# Altium PCB E20XXEDGEPCBA1.PcbDoc
Units mil, origin at the board's own origin, x right, y up, seen from the top; angles counter-clockwise.
Board outline 2300 x 1600 mil, 2 copper layers (Top Layer, Bottom Layer); 13 components, 46 nets, 73 pads, 3 vias.
Unrouted connection lines stored in the file: 1.
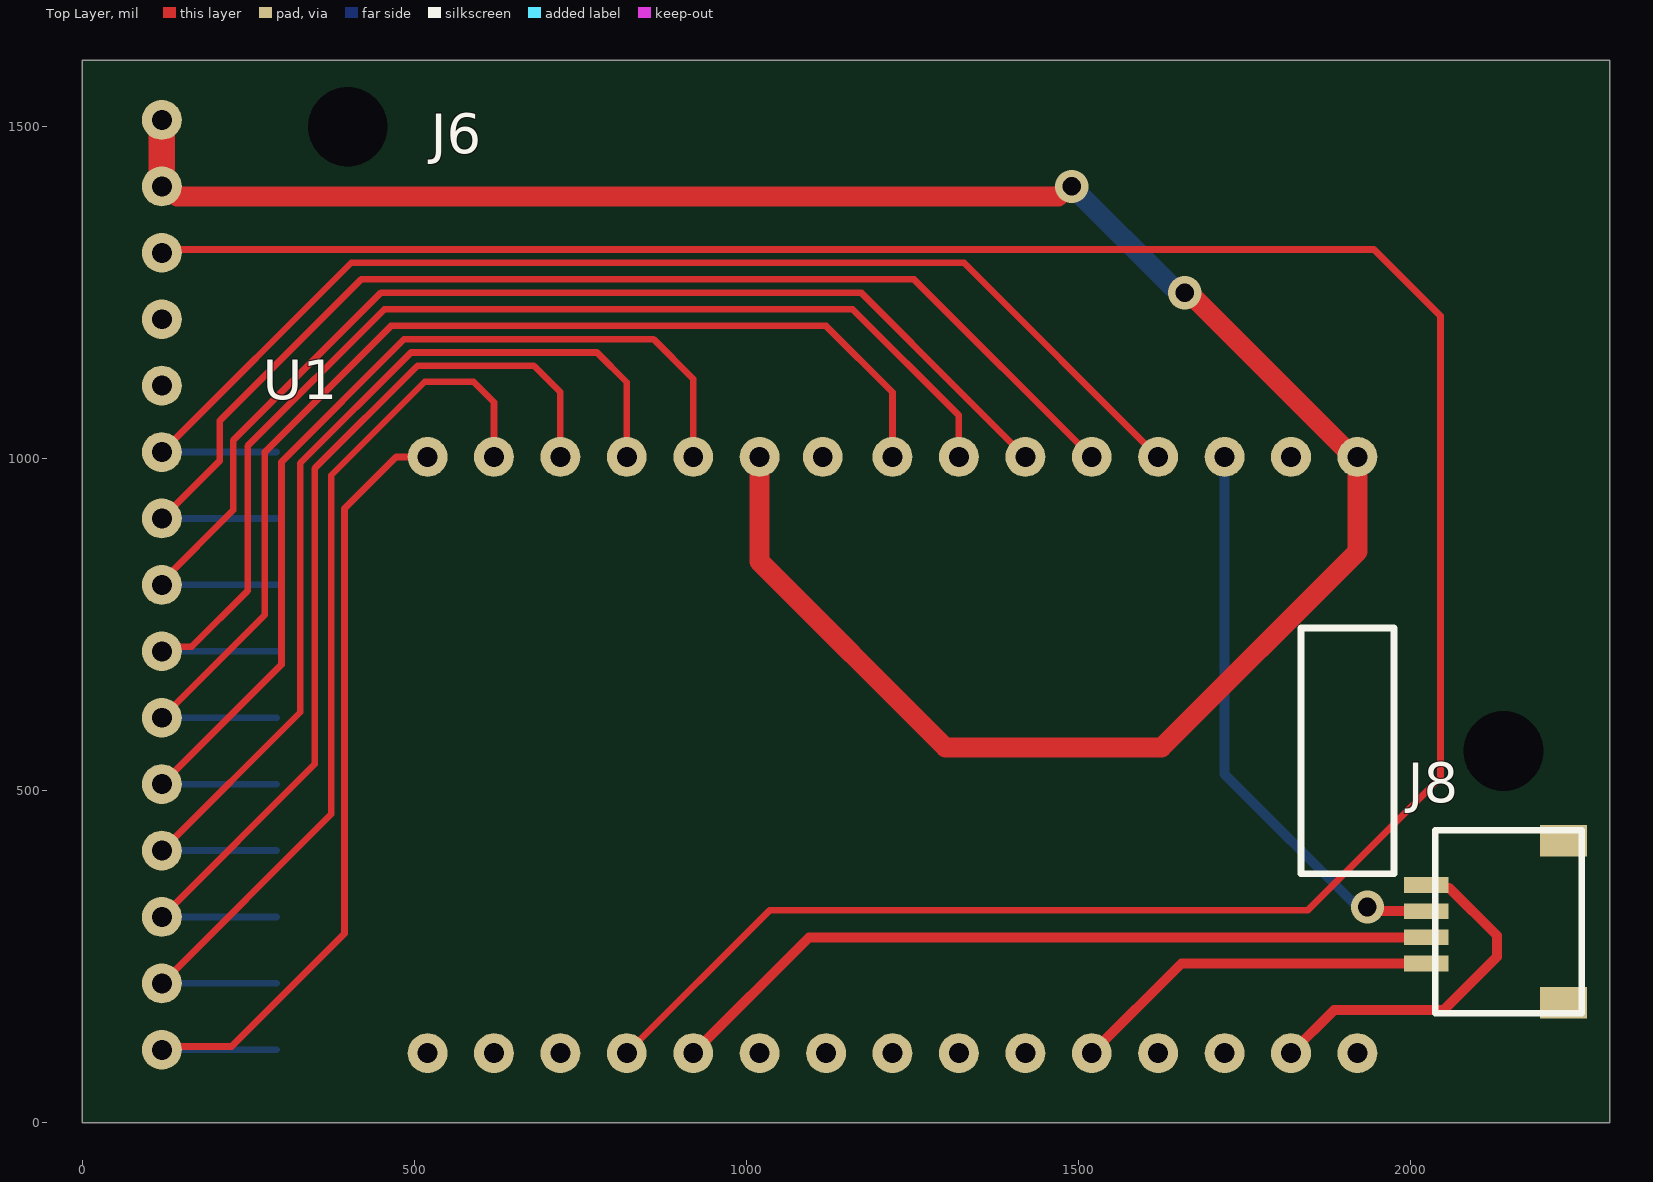
[diagram p0: Top Layer view]
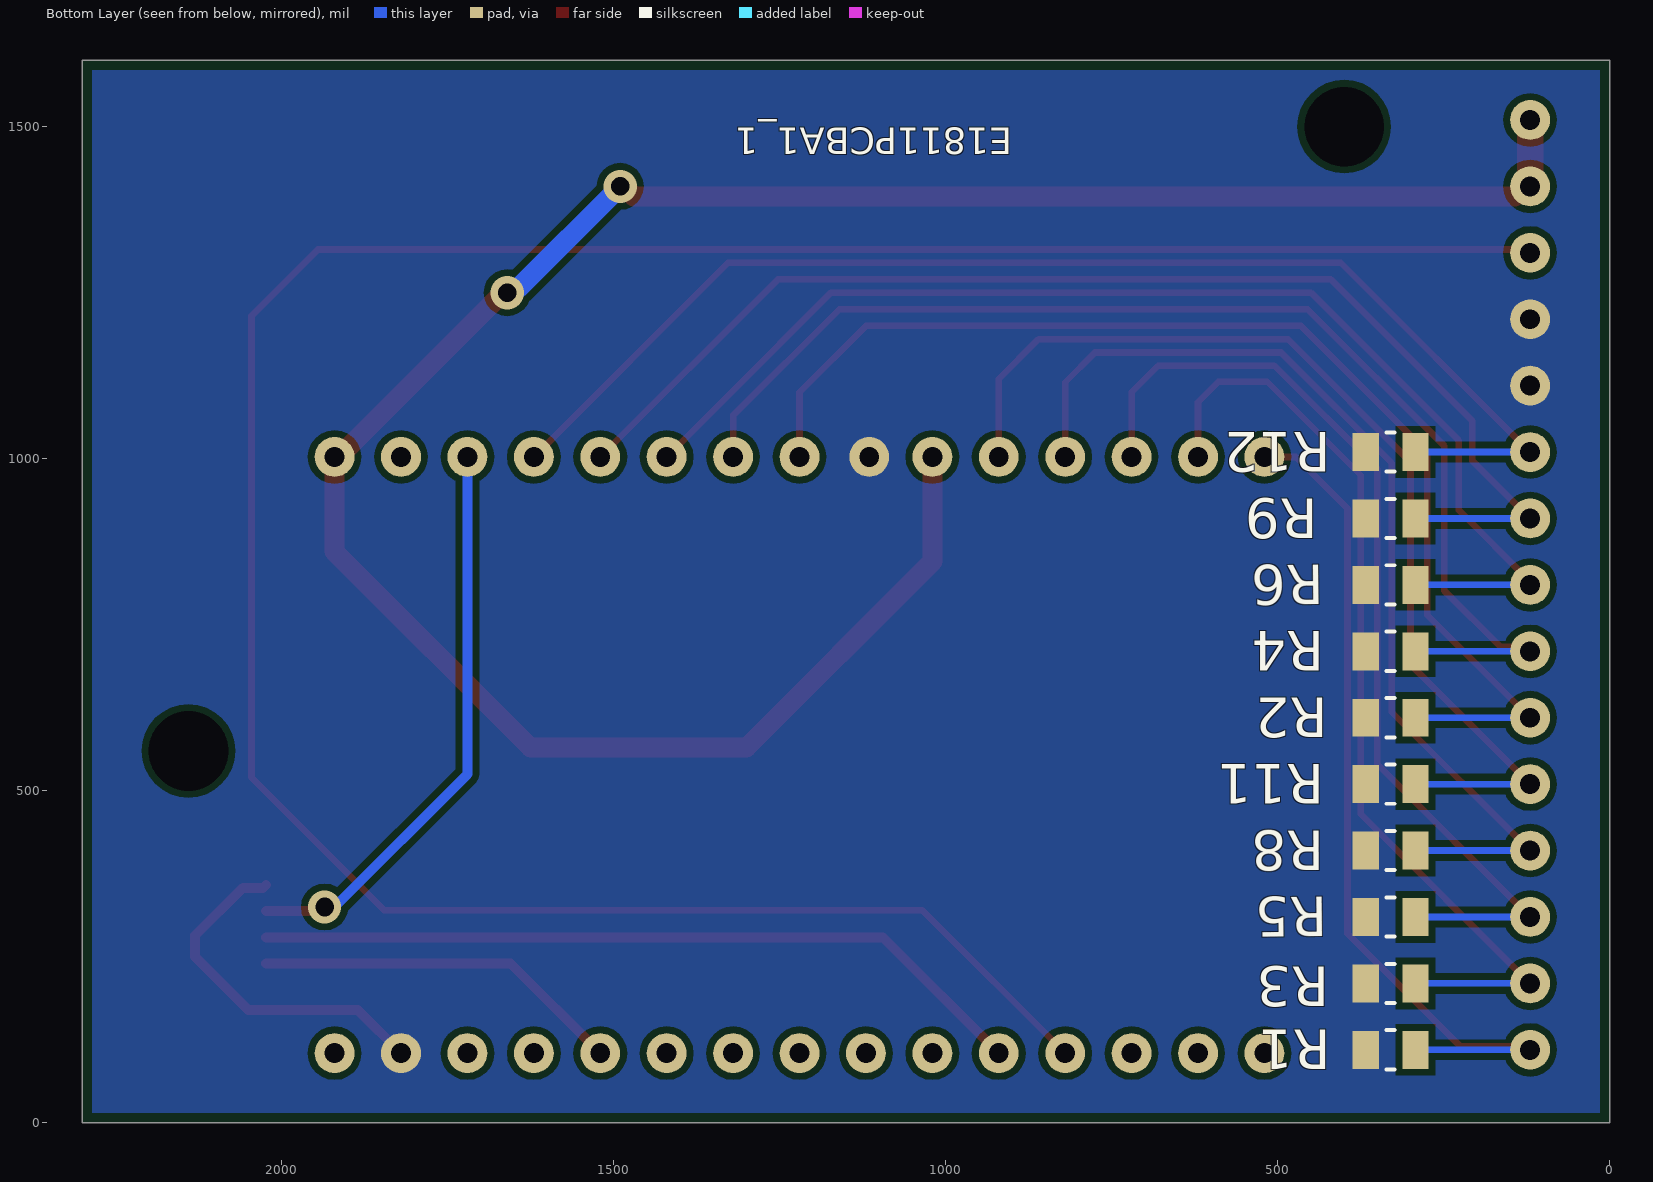
[diagram p1: Bottom Layer view, seen from below]
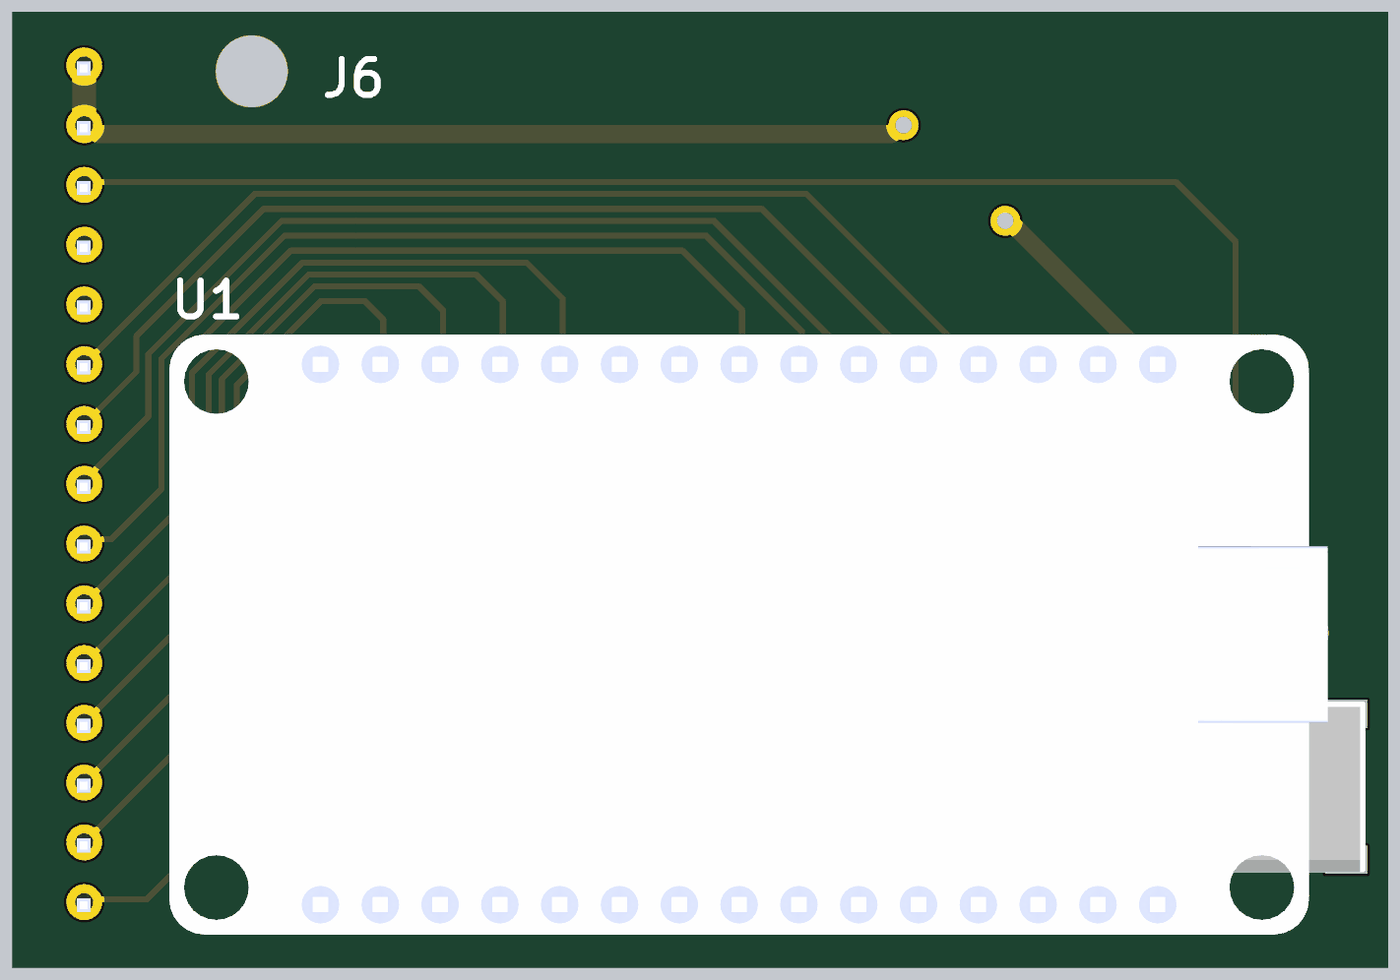
[diagram p2: 3D render of the assembled board from above, using the file's embedded part models]
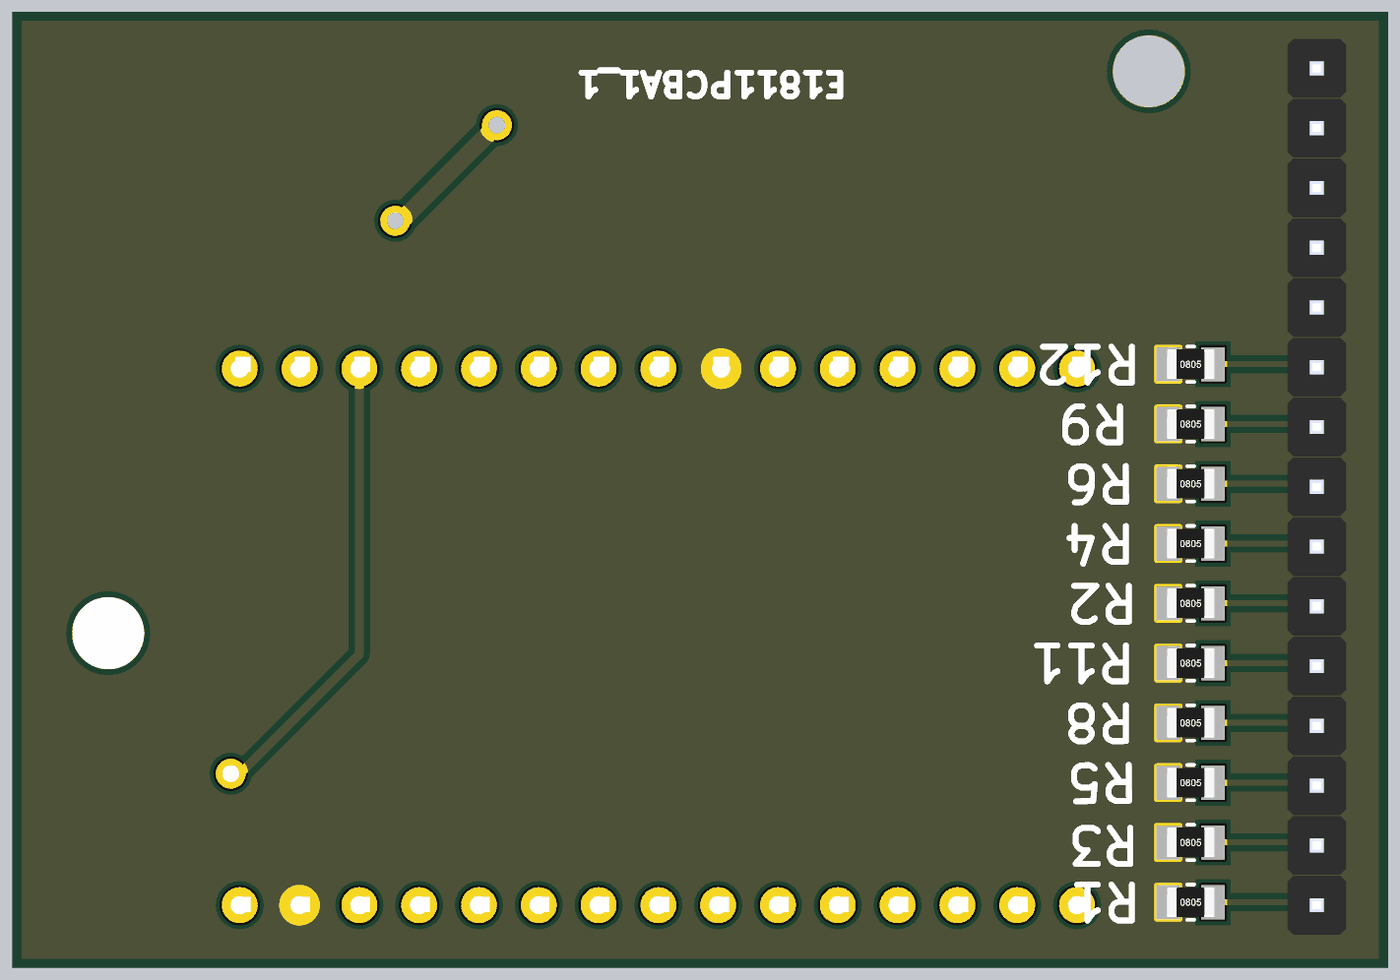
[diagram p3: 3D render of the assembled board from below, using the file's embedded part models]

## Layer stack, top to bottom
Top Solder: solder mask 0.4, Solder Resist, Dk 3.5
Top Layer: signal copper 1.4
Dielectric 1: dielectric 12.6, FR-4, Dk 4.8
Bottom Layer: signal copper 1.4
Bottom Solder: solder mask 0.4, Solder Resist, Dk 3.5

## Board outline
0,0 0,1600 2300,1600 2300,0

## Design rules (kind name [scope] priority, off if disabled: settings)
Clearance [All] p1: gap=10 ignorepadtopadclearanceinfootprint=FALSE except(0: Arc-Hole Track-Hole SMDPad-Hole THPad-Hole Via-Hole Fill-Hole Poly-Hole Region-Hole Text-Hole)
PlaneConnect [All] p1: planeconnectstyle=Direct reliefexpansion=20 reliefentries=4 reliefconductorwidth=10 reliefairgap=10
PolygonConnect [All] p1: connectstyle=Direct reliefconductorwidth=10 reliefentries=4 polygonreliefangle="90 Angle" airgapwidth=10
RoutingVias [All] p1: holewidth=28 width=50 viastyle="Through Hole" minholewidth=28 minwidth=50 maxholewidth=28 maxwidth=50
SolderMaskExpansion [All] p1: expansion=4 istentingtop=FALSE
Width [All] p1: maxlimit=50 minlimit=10 preferedwidth=10
29 further rules are at their usual default settings.

## Components (designator, comment, footprint, x,y, rotation, side; value= is the part's Value field where it differs from the comment)
J6 "61301511121" 61301511121 120,110 r90 top
J8 "84981-4" 84981-4 2257.56,165.16 r90 top
R1 "10K" RESC2012N 330,110 r180 bottom
R2 "10K" RESC2012N 330,610 r180 bottom
R3 "10K" RESC2012N 330,210 r180 bottom
R4 "10K" RESC2012N 330,710 r180 bottom
R5 "10K" RESC2012N 330,310 r180 bottom
R6 "10K" RESC2012N 330,810 r180 bottom
R8 "10K" RESC2012N 330,410 r180 bottom
R9 "10K" RESC2012N 330,910 r180 bottom
R11 "10K" RESC2012N 330,510 r180 bottom
R12 "10K" RESC2012N 330,1010 r180 bottom
U1 "ESP8266MOD" ESP8266NODEMCU 520,105 r90 top

## Footprints (in the part's own frame and the unit in brackets; to place one, negate y for a bottom-side part, rotate by r counter-clockwise, add the part's x,y. Pads: shape width x height; smd on the part's side, far side on the other; paste and mask are expansions set on the pad)
84981-4 [mm]
  rect 1.2x1.8 smd: 0(0.4,0.7) 0(6.6,0.7)
  rect 0.6x1.7 smd: 1(1.9,5.95) 2(2.9,5.95) 3(3.9,5.95) 4(4.9,5.95)
  silkscreen extent 0,0 7,5.6, body extent -0.1,0.1 6.9,6.4, height 3
61301511121 [mil]
  round 60 hole 30: 1(0,0) 2(100,0) 3(200,0) 4(300,0) 5(400,0) 6(500,0) 7(600,0) 8(700,0) 9(800,0) 10(900,0) 11(1000,0) 12(1100,0) 13(1200,0) 14(1300,0) 15(1400,0)
  body extent -54,-48 1444,50, height 85
ESP8266NODEMCU [mil] "NODEMCU ESP8266"
  round 60 hole 30: 1(0,0) 2(0,-100) 3(0,-200) 4(0,-300) 5(0,-400) 6(0,-500) 7(0,-600) 8(0,-700) 9(0,-800) 10(0,-900) 11(0,-1000) 12(0,-1100) 13(0,-1200) 14(0,-1300) 15(0,-1400) 16(897.64,-1400) 17(897.64,-1300) 18(897.64,-1200) 19(897.64,-1100) 20(897.64,-1000) 21(897.64,-900) 22(897.64,-800) 23(897.64,-700) 24(897.64,-595) 25(897.64,-500) 26(897.64,-400) 27(897.64,-300) 28(897.64,-200) 29(897.64,-100) 30(897.64,0)
  body extent -49,-1679 955,258, height 299
RESC2012N [mm] "Chip Resistor, Body 2.0x1.3mm, IPC Med Density"
  rect 1x1.45 smd: 1(-0.95,0) 2(0.95,0)
  silkscreen extent -0.15,-0.75 0.15,0.75, body extent -1,-0.62 1,0.63, height 0.59

## Part data
J6: "WURTH ELEKTRONIK         61301511121            Board-To-Board Connector, Vertical, WR-PHD Series, Through Hole, Header, 15 Contacts, 2.54 mm", Color=Black, Manufacturer="Wurth Electronics", Supplier Part Number 1=732-5326-ND, Category=Connectors, ComponentLink1Description=http://www.farnell.com/cad/1737268.pdf?src-supplier=Element14, ComponentLink1URL=http://www.farnell.com/cad/1737268.pdf?src-supplier=Element14, ComponentLink2Description=https://katalog.we-online.de/em/datasheet/6130xx11121.pdf?src-supplier=Digi-Key, ComponentLink2URL=https://katalog.we-online.de/em/datasheet/6130xx11121.pdf?src-supplier=Digi-Key, Connector Type="Male Pin", Contact Material=Copper, Contact Mating Length=0.236inch, Contact Plating=Gold, Gender=Male, Manufacturer Part Number=61301511121, Mount="Through Hole", Number of Contacts=15, Number of Positions=15, Number of Rows=1, Packaging=Bulk, Pitch=0.1inch, Pricing 1="1=0.82000, 10=0.69700, 25=0.58120, 50=0.48400, 100=0.44000, 500=0.40000 (USD)", REACH SVHC=Unknown, RoHS=Yes, RoHS Compliant=Yes, Stock 1=961, Supplier 1=Digi-Key, Termination=Solder
R1 R2 R3 R4 R5 R6 R8 R9 R11 R12: library part Res_10K_0805, "RES 10K OHM 1/8W 1% 0805", Case Code (Imperial)=0805, Case Code (Metric)=2012, Manufacturer=Vishay, Manufacturer P/N=CRCW080510K0FKEA, Max Operating Temperature=155°C, Min Operating Temperature=-55°C, Package Quantity=5000, Power Rating=125mW, Resistance=10kR, Supplier Part Number 1=541-10.0KCCT-ND, Temperature Coefficient=100ppm/°C, Tolerance=1%, Voltage Rating=150V, Case/Package=0805, ComponentLink4Description=http://www.vishay.com/docs/20035/dcrcwe3.pdf, ComponentLink4URL=http://www.vishay.com/docs/20035/dcrcwe3.pdf, Composition="Thick Film", Contact Plating=Tin, Depth=1.25mm, Height=0.45mm, Lead Free="Lead Free", Length=2mm, Military Standard=Not, Radiation Hardening=No, REACH SVHC=Unknown, Supplier 1=Digi-Key, Termination=SMD/SMT, Voltage Rating (DC)=150V, Weight=0.000194oz, Width=1.25mm

## Free pads (board coordinates)
  round 60 hole 120: 0(400,1500) 0(2140,560)

## Via types
v1: diameter 50, hole 28, Top Layer to Bottom Layer, 3 vias

## Nets (pads, with @x,y where several pads share a name; then routed paths per layer and width w, separated by ;. In a path a pad name is that pad's centre, name@x,y a point inside that pad or via, vN(x,y) a via of type N, cw(c..) or ccw(c..) an arc to the next point about the centre after c; other vN are vias at no path point)
GND: J6.11 J6.12 J8.4 R1.1 R2.1 R3.1 R4.1 R5.1 R6.1 R8.1 R9.1 R11.1 R12.1 U1.14 U1.24 | length 540.3
  Top Layer w15: U1.14 1885,170 2050,170 2130,250 2130,282.03 2058.27,353.76 2027.62,353.76 J8.4
GND_HOUS: 
NetC3_2: 
NetC4_2: 
NetC5_2: 
NetC6_2: 
NetC7_2: 
NetC8_2: 
NetJ1_1: 
NetJ1_3: 
NetJ3_1: 
NetJ3_2: 
NetJ3_3: 
NetJ4_1: 
NetJ4_2: 
NetJ4_3: 
NetJ4_4: 
NetJ4_5: 
NetJ4_6: 
NetJ4_7: 
NetJ4_8: 
NetJ4_9: 
NetJ4_10: 
NetJ4_11: 
NetJ6_1: J6.1 R1.2 U1.30 | length 1317.2
  Top Layer w10: J6.1 125,115 225,115 395,285 395,925 472.64,1002.64 U1.30
  Bottom Layer w10: J6.1 R1.2
NetJ6_2: J6.2 R3.2 U1.29 | length 1441.7
  Top Layer w10: J6.2 375,465 375,975 515.86,1115.86 589.14,1115.86 620,1085 U1.29
  Bottom Layer w10: J6.2 R3.2
NetJ6_3: J6.3 R5.2 U1.28 | length 1491
  Top Layer w10: J6.3 350,540 350,985 505,1140 680,1140 720,1100 U1.28
  Bottom Layer w10: J6.3 R5.2
NetJ6_4: J6.4 R8.2 U1.27 | length 1533.9
  Top Layer w10: J6.4 328.36,618.36 328.36,993.36 495,1160 775,1160 820,1115 U1.27
  Bottom Layer w10: J6.4 R8.2
NetJ6_5: J6.5 R11.2 U1.26 | length 1571
  Top Layer w10: J6.5 300,690 300,995 485,1180 860,1180 920,1120 U1.26
  Bottom Layer w10: J6.5 R11.2
NetJ6_6: J6.6 R2.2 U1.23 | length 1799.3
  Top Layer w10: J6.6 275,765 275,1010 465,1200 1120,1200 1220,1100 U1.23
  Bottom Layer w10: J6.6 R2.2
NetJ6_7: J6.7 R4.2 U1.22 | length 1842.3
  Top Layer w10: J6.7 127,717 165,717 249,801 249,1019 455,1225 1160,1225 1320,1065 U1.22
  Bottom Layer w10: J6.7 R4.2
NetJ6_8: J6.8 R6.2 U1.21 | length 1821.7
  Top Layer w10: J6.8 120,815 227.28,922.28 227.28,1027.28 450,1250 1172.64,1250 1326.64,1095.99 U1.21
  Bottom Layer w10: J6.8 R6.2
NetJ6_9: J6.9 R9.2 U1.20 | length 1867.6
  Top Layer w10: J6.9 207.28,997.28 207.28,1057.28 420,1270 1252.64,1270 U1.20
  Bottom Layer w10: J6.9 R9.2
NetJ6_10: J6.10 R12.2 U1.19 | length 1911.7
  Top Layer w10: J6.10 405,1295 1327.64,1295 U1.19
  Bottom Layer w10: J6.10 R12.2
NetJ6_13: J6.13 U1.4 | length 4060.4
  Top Layer w10: J6.13 125,1315 1945,1315 2045,1215 2045,520 1845,320 1035,320 U1.4
NetJ7_13: 
NetJ8_2: J8.2 U1.5 | length 1175.5
  Top Layer w15: U1.5 1094.33,279.33 J8.2
NetJ8_3: J8.3 U1.18 | length 851.4
  Top Layer w15: v1(1935,325) 1941.3,318.7 J8.3
  Bottom Layer w15: U1.18 1720,525 v1@1920,325
NetLED1_1: 
NetLED2_1: 
NetLED3_1: 
NetLED4_1: 
NetLED5_1: 
NetPSU1_1: 
NetQ1_3: 
VCC: J6.14 J6.15 J8.1 U1.11 U1.16 U1.25 | length 4077
  Top Layer w15: U1.11 1654.96,239.96 J8.1 ; v1(1660,1250) v1@1666.32,1250 ; U1.16@1913.68,1002.64 U1.16
  Top Layer w30: J6.14 128.12,1410 143.12,1395 1469.59,1395 1480.76,1406.17 1482.14,1406.17 v1@1487.56,1400.76 ; U1.25 1020,845 1300,565 1625,565 1920,860 U1.16 ; v1@1666.32,1250 U1.16@1913.68,1002.64
  Top Layer w40: J6.14 J6.15
  Bottom Layer w15: v1@1643.3,1256.7 1653.3,1256.7 v1(1660,1250)
  Bottom Layer w30: v1(1490,1410) v1@1643.3,1256.7
pads on no net: J8.0 U1.1 U1.2 U1.3 U1.6 U1.7 U1.8 U1.9 U1.10 U1.12 U1.13 U1.15 U1.17

## Polygon pours and split planes (outlines as drawn)
GND on Bottom Layer "GND_L02_P000" (solid, pour order 0): 15,1585 2285,1585 2285,15 15,15

## Silkscreen, mask and mechanical layers (free items; w line width, h text height)
Top Overlay:
  lines w10: 1835,375 1975,375 1975,745 1835,745 1835,375
Bottom Overlay:
  text "E1811PCBA1_1" at 900,1498.34 h40 r180
Mechanical 1:
  the board outline again, w10